# EAGLE board SchematicTSC (EAGLE 9.7.0)
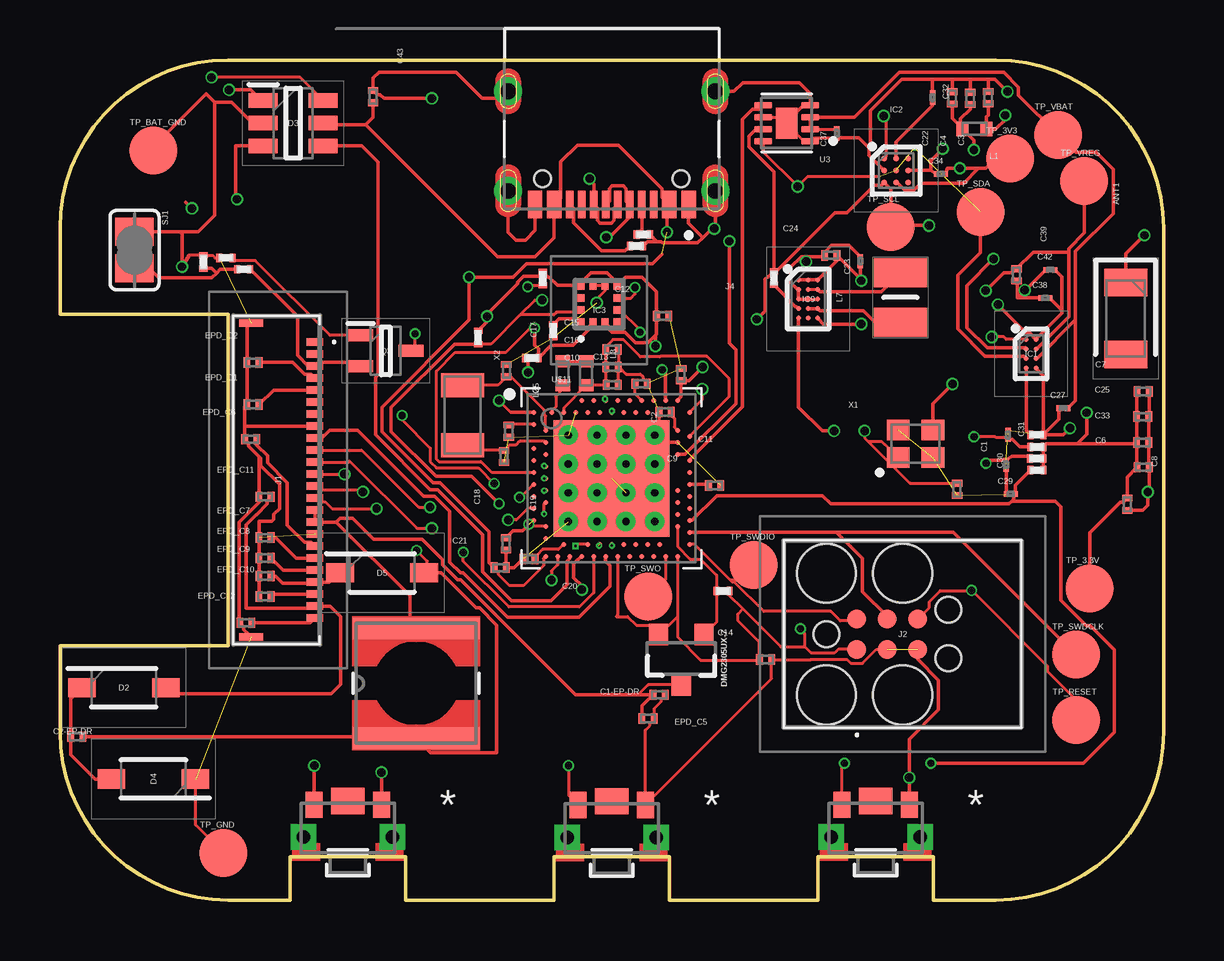
[diagram p0: board, top side]
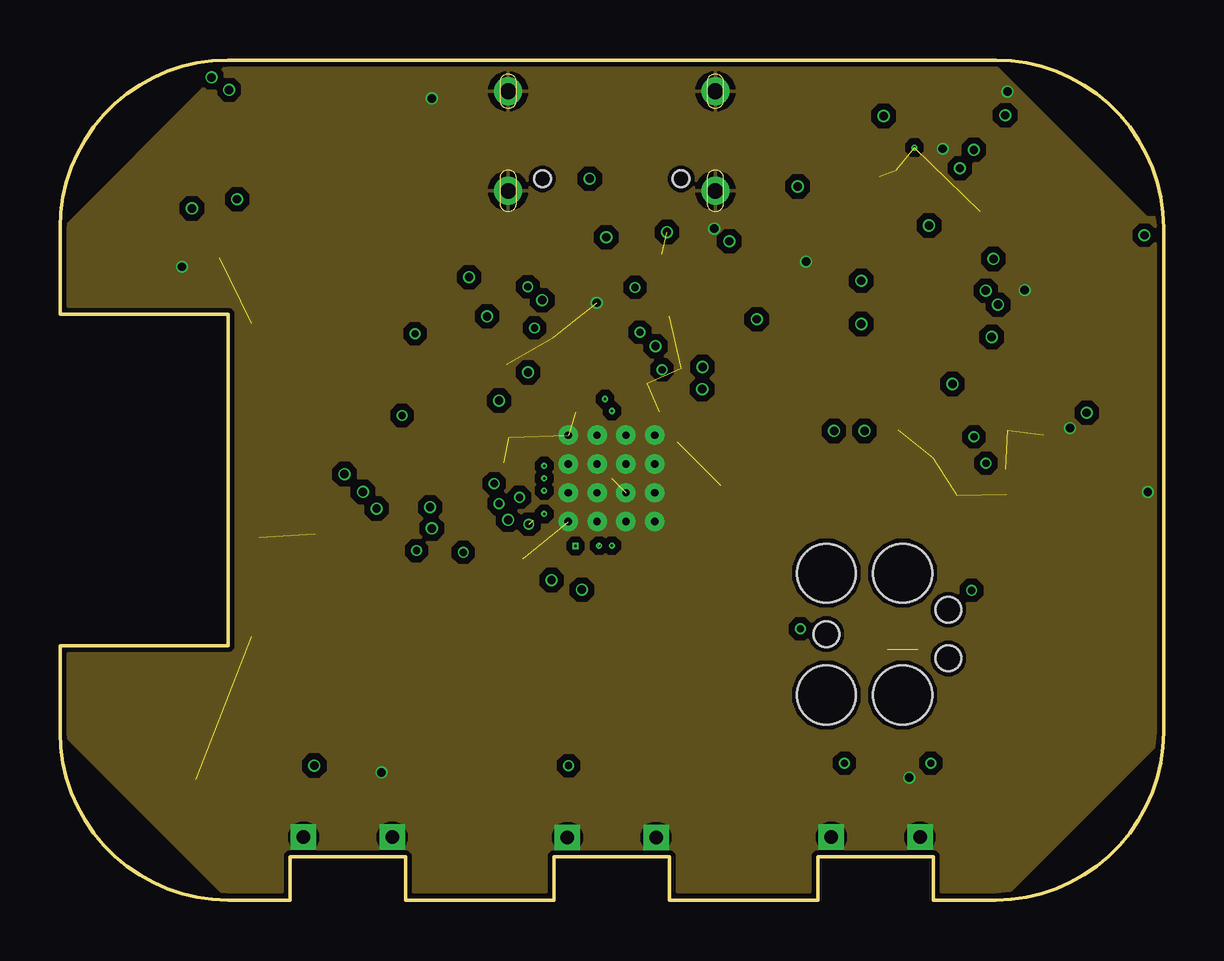
[diagram p1: board, inner layer Route2]
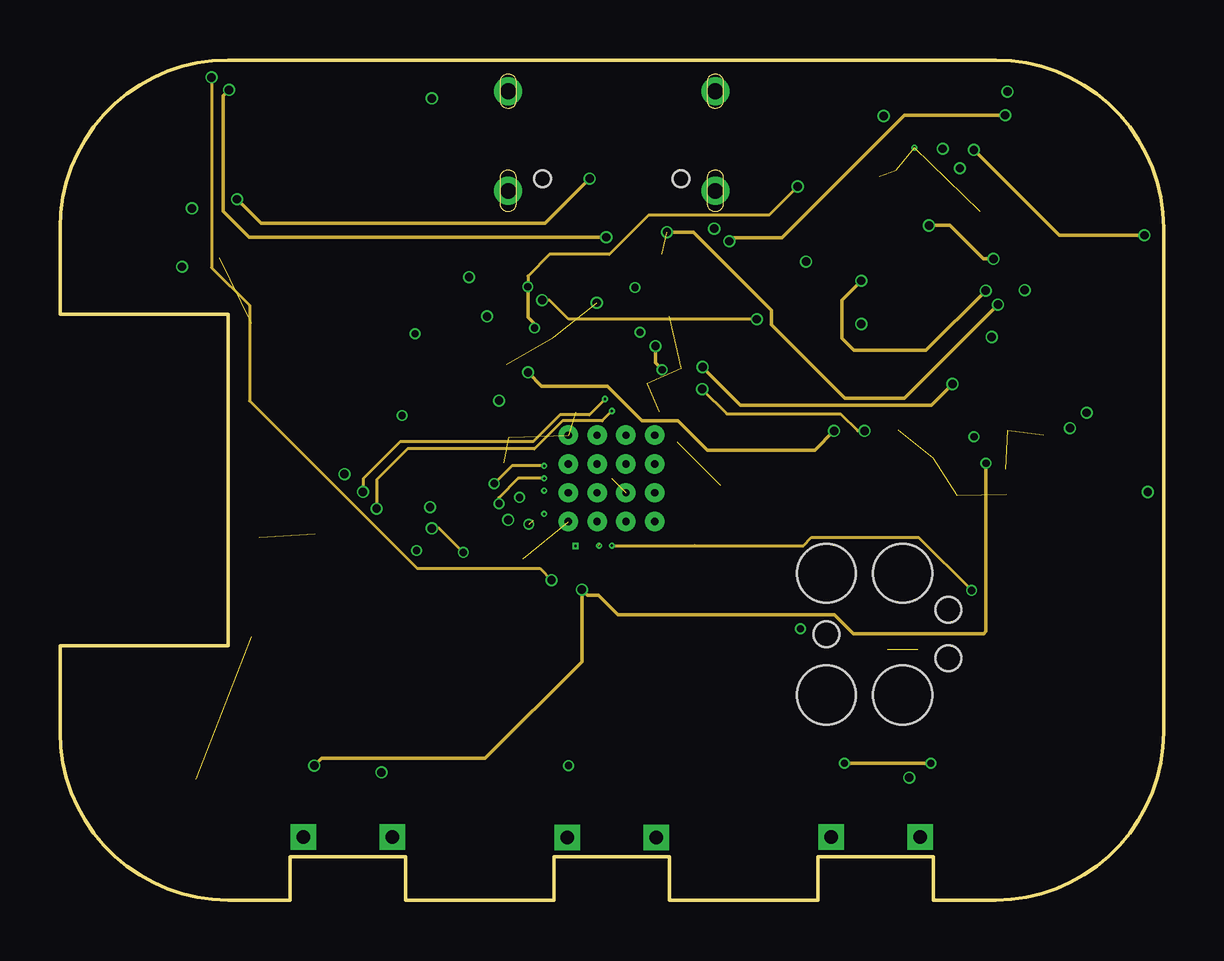
[diagram p2: board, inner layer Route63]
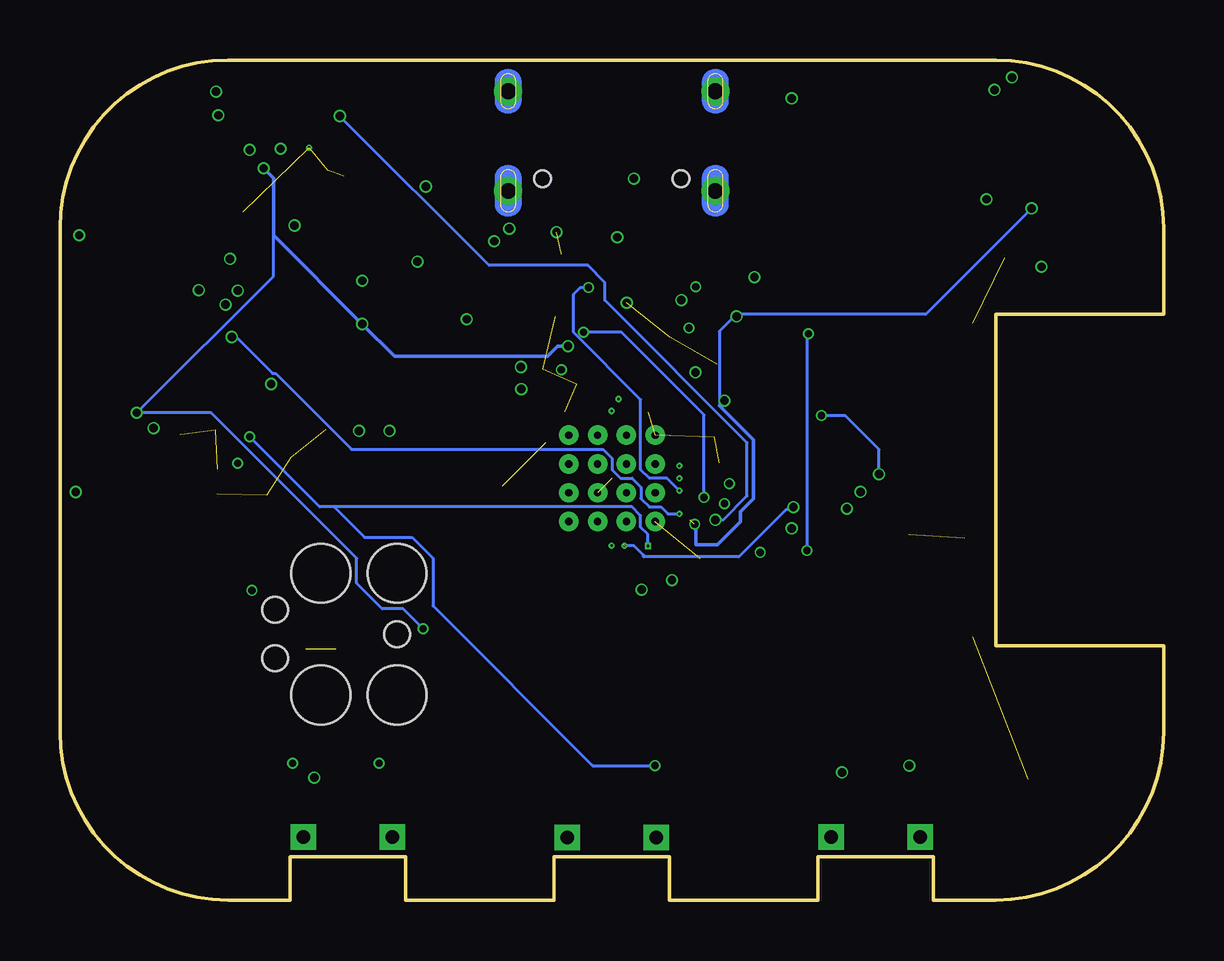
[diagram p3: board, bottom side, seen from below]

Size 46 x 35 mm. Coordinates in mm from the lower left corner, seen from the top.
Outline: 39,0 36.4,0 36.4,1.8 31.6,1.8 31.6,0 25.4,0 25.4,1.8 20.6,1.8 20.6,0 14.4,0 14.4,1.8 9.6,1.8 9.6,0 7,0 arc-90 0,7 0,10.6 7,10.6 7,24.4 0,24.4 0,28 arc-90 7,35 39,35 arc-90 46,28 46,7 arc-90 39,0
Copper layers (1+2*15+16): Top / Route2 / Route63 / Bottom
Stack-up 4 Layer Stack: Top SilkScreen Epoxy Ink / Top SolderMask SR:Green 0.0254mm Dk 4.3 / Top Surface Finish Lead-Free 0.02mm / Top User Defined 0.0151mm / Dielectric-1 User Defined 0.15mm / Route2 User Defined 0.0145mm / Dielectric-3 User Defined 0.55mm / Route63 User Defined 0.0145mm / Dielectric-5 User Defined 0.15mm / Bottom User Defined 0.0151mm / Bottom Surface Finish Lead-Free 0.02mm / Bottom SolderMask SR:Green 0.0254mm Dk 4.3 / Bottom SilkScreen Epoxy Ink
Design rules: minimum copper width 5mil, minimum drill size 0.3mm, copper clearance wire_polygon to wire_polygon 5mil, copper clearance wire_polygon to pad_smd 5mil, copper clearance wire_polygon to via 5mil, copper clearance pad_smd to pad_smd 5mil, copper clearance pad_smd to via 0.027mm, copper clearance via to via 0.027mm, copper clearance smd to pad (same net) 5mil, copper clearance smd to via (same net) 5mil, copper clearance smd to smd (same net) 5mil, dimension clearance 0.2mm, via restrict clearance 0mil, restrict clearance 0mil, drill distance 6mil, keepout clearance 0mil

## Footprints (pad centres in the part's own frame; a part is rotated, then mirrored left to right if it is on the bottom)
2450AT18B100E_ANTC3216X140N = smd 1.15 x 1.8: 1 -1.5,0; 2 1.5,0
NORDIC_NRF_3_RESC0201_L = smd 0.28 x 0.43: 1 -0.255,0; 2 0.255,0
GRM011R60J152KE01L_2_CAPC0201X13N = smd 0.22 x 0.23: 1 -0.185,0; 2 0.185,0
ESP32_C6_LIBRARY_5_SOD3716X135N = smd 1.15 x 0.8: 1 -1.75,0; 2 1.75,0
ESP32_C6_LIBRARY_3_SOT95P280X145-6N = smd 1.2 x 0.6: 1 -1.25,0.95; 2 -1.25,0; 3 -1.25,-0.95; 4 1.25,-0.95; 5 1.25,0; 6 1.25,0.95
ESP32_C6_LIBRARY_4_ESP32_C6_LIBRARY_4_ESP32_C6_LIBRARY_4_ESP32_C6_LIBRARY_4_ESP32_WROVER_SPARKFUN-DISCRETESEMI_SOT23-3 = smd 0.8 x 0.9: 1 -0.95,-1; 2 0.95,-1; 3 0,1.1
BQ25180YBGR_BGA8C40P2X4_100X155X50 = smd 0.2 x 0.2: A1 -0.2,0.6; A2 0.2,0.6; B1 -0.2,0.2; B2 0.2,0.2; C1 -0.2,-0.2; C2 0.2,-0.2; D1 -0.2,-0.6; D2 0.2,-0.6
DRV2605YZFR_BGA9C50P3X3_144X144X62 = smd 0.25 x 0.25: A1 -0.5,0.5; A2 0,0.5; A3 0.5,0.5; B1 -0.5,0; B2 0,0; B3 0.5,0; C1 -0.5,-0.5; C2 0,-0.5; C3 0.5,-0.5
BMA423_BMA423 = smd 0.3 x 0.35: 1 -0.75,-0.775; 2 -0.25,-0.775; 3 0.25,-0.775; 4 0.75,-0.775; 7 0.75,0.775; 8 0.25,0.775; 9 -0.25,0.775; 10 -0.75,0.775 | smd 0.35 x 0.3: 5 0.775,-0.25; 6 0.775,0.25; 11 -0.775,0.25; 12 -0.775,-0.25
RT6160AWSC_BGA15C40P3X5_140X230X60 = smd 0.216 x 0.216: A1 -0.4,0.8; A2 0,0.8; A3 0.4,0.8; B1 -0.4,0.4; B2 0,0.4; B3 0.4,0.4; C1 -0.4,0; C2 0,0; C3 0.4,0; D1 -0.4,-0.4; D2 0,-0.4; D3 0.4,-0.4; E1 -0.4,-0.8; E2 0,-0.8; E3 0.4,-0.8
503480-2400_5034802400 = smd 0.3 x 0.7: 1 -5.75,1.525; 2 -5.25,1.525; 3 -4.75,1.525; 4 -4.25,1.525; 5 -3.75,1.525; 6 -3.25,1.525; 7 -2.75,1.525; 8 -2.25,1.525; 9 -1.75,1.525; 10 -1.25,1.525; 11 -0.75,1.525; 12 -0.25,1.525; 13 0.25,1.525; 14 0.75,1.525; 15 1.25,1.525; 16 1.75,1.525; 17 2.25,1.525; 18 2.75,1.525; 19 3.25,1.525; 20 3.75,1.525; 21 4.25,1.525; 22 4.75,1.525; 23 5.25,1.525; 24 5.75,1.525 | smd 0.3 x 1: MP1 -6.54,-1.125; MP2 6.54,-1.125
TC2030-IDC_TC2030IDC = smd 0.783 x 0.783: 1 -0.953,-0.635; 2 -0.953,0.635; 3 0.317,-0.635; 4 0.317,0.635; 5 1.588,-0.635; 6 1.588,0.635 | hole 2.451: -2.223,-2.54; -2.223,2.54; 0.952,-2.54; 0.952,2.54 | hole 1.067: -2.223,0; 2.857,-1.016; 2.857,1.016
KH-TYPE-C-16P_KINGHELM_KH-TYPE-C-16P = smd 0.6 x 1.15: A1_B12 -3.2,4.725; A4_B9 -2.4,4.725; A9_B4 2.4,4.725; A12_B1 3.2,4.725 | smd 0.3 x 1.15: A5 -1.25,4.725; A6 -0.25,4.725; A7 0.25,4.725; A8 1.25,4.725; B5 1.75,4.725; B6 0.75,4.725; B7 -0.75,4.725; B8 -1.75,4.725 | drill 0.65 pad 1.05: SH1 -4.32,0; SH2 4.32,0; SH3 -4.32,4.15; SH4 4.32,4.15 | hole 0.7: -2.89,3.65; 2.89,3.65
NORDIC_NRF_2_RESC0402_L = smd 0.5 x 0.6: 1 -0.5,0; 2 0.5,0
ESP32_C6_LIBRARY_2_IND_4828-WE-TPC_WRE = smd 0.9 x 5.3: 1 -2.286,0; 2 2.286,0
MLP2016SR47MT0S1_INDC2016X100N = smd 1.2 x 2.2: 1 -1.028,0; 2 1.028,0
ESP32_C6_LIBRARY_6_SOT65P210X110-3N = smd 1.05 x 0.5: 1 -1.05,0.65; 2 -1.05,-0.65; 3 1.05,0
CPF0201D7K68C1_0201 = smd 0.35 x 0.25: 1 0,0.275; 2 0,-0.275
ESP32_C6_LIBRARY_7_JUMPER_SJ = smd 1.168 x 1.6: 1 -0.762,0; 2 0.762,0
2025-10-22_07-23-44_LIBRARY_SW_EVP-AKE31A_PAN = smd 0.711 x 1.092: 1 -1.4,-0.972; 2 1.4,-0.972 | drill 0.559 pad 0.914 square: 3 -1.848,0.381; 4 1.848,0.381 | smd 1.397 x 1.092: 5 0,-1.124
HECTOR_WATCH_1_TP20R = smd 2 x 2: TP 0,0
ESP32_C6_LIBRARY_SON50P200X200X80-9N = smd 0.76 x 0.27: 1 -0.985,0.75; 2 -0.985,0.25; 3 -0.985,-0.25; 4 -0.985,-0.75; 5 0.985,-0.75; 6 0.985,-0.25; 7 0.985,0.25; 8 0.985,0.75 | smd 0.9 x 1.3: 9 0,0
NORDIC_NRF_4_AQFN50P700X700X85_HS-74N = smd 4.85 x 4.85: P$74 0,0 | drill 0.3 pad 0.6: P$75 -1.8,1.8; P$76 -0.6,1.8; P$77 0.6,1.8; P$78 1.8,1.8; P$79 -1.8,0.6; P$80 -0.6,0.6; P$81 0.6,0.6; P$82 1.8,0.6; P$83 -1.8,-0.6; P$84 -0.6,-0.6; P$85 0.6,-0.6; P$86 1.8,-0.6; P$87 -1.8,-1.8; P$88 -0.6,-1.8; P$89 0.6,-1.8; P$90 1.8,-1.8 | smd 0.2 x 0.2: P$A8 -1.25,3.25; P$A10 -0.75,3.25; P$A12 -0.25,3.25; P$A14 0.25,3.25; P$A16 0.75,3.25; P$A18 1.25,3.25; P$A20 1.75,3.25; P$A22 2.25,3.25; P$A23 2.75,3.25; P$AA24 3.25,-2.25; P$AB2 -2.75,-2.5; P$AC5 -2,-2.75; P$AC9 -1,-2.75; P$AC11 -0.5,-2.75; P$AC13 0,-2.75; P$AC15 0.5,-2.75; P$AC17 1,-2.75; P$AC19 1.5,-2.75; P$AC21 2,-2.75; P$AC24 3.25,-2.75; P$AD2 -2.75,-3.25; P$AD4 -2.25,-3.25; P$AD6 -1.75,-3.25; P$AD8 -1.25,-3.25; P$AD10 -0.75,-3.25; P$AD12 -0.25,-3.25; P$AD14 0.25,-3.25; P$AD16 0.75,-3.25; P$AD18 1.25,-3.25; P$AD20 1.75,-3.25; P$AD22 2.25,-3.25; P$AD23 2.75,-3.25; P$B1 -3.25,2.75; P$B3 -2.5,2.75; P$B5 -2,2.75; P$B7 -1.5,2.75; P$B9 -1,2.75; P$B11 -0.5,2.75; P$B13 0,2.75; P$B15 0.5,2.75; P$B17 1,2.75; P$B19 1.5,2.75; P$B24 3.25,2.75; P$C1 -3.25,2.25; P$D2 -2.75,2; P$D23 2.75,2; P$E24 3.25,1.75; P$F2 -2.75,1.5; P$F23 2.75,1.5; P$G1 -3.25,1.25; P$H2 -2.75,1; P$H23 2.75,1; P$J1 -3.25,0.75; P$J24 3.25,0.75; P$K2 -2.75,0.5; P$L1 -3.25,0.25; P$L24 3.25,0.25; P$M2 -2.75,0; P$N1 -3.25,-0.25; P$N24 3.25,-0.25; P$P2 -2.75,-0.5; P$P23 2.75,-0.5; P$R1 -3.25,-0.75; P$R24 3.25,-0.75; P$T2 -2.75,-1; P$T23 2.75,-1; P$U1 -3.25,-1.25; P$U24 3.25,-1.25; P$V23 2.75,-1.5; P$W1 -3.25,-1.75; P$W24 3.25,-1.75; P$Y2 -2.75,-2; P$Y23 2.75,-2
NORDIC_NRF_BT-XTAL_2016_N = smd 0.95 x 0.85: 1 -0.725,-0.575; 2 0.725,-0.575; 3 0.725,0.575; 4 -0.725,0.575
NORDIC_NRF_1_XTAL_3215_N = smd 1 x 1.8: 1 -1.25,0; 2 1.25,0

## Placement (x,y rotation side)
ANT1  2450AT18B100E  [2450AT18B100E_ANTC3216X140N]  44.42,24.23 270 top
C1  12pF  [NORDIC_NRF_3_RESC0201_L]  37.39,17.11 270 top
C1-EP-DR  10uF  [NORDIC_NRF_3_RESC0201_L]  24.51,7.56 0 top
C2  12pF  [NORDIC_NRF_3_RESC0201_L]  25.89,21.89 90 top
C2-EP-DR  4.7uF/25V  [NORDIC_NRF_3_RESC0201_L]  0.71,6.8 0 top
C3  1pF  [NORDIC_NRF_3_RESC0201_L]  38.69,33.43 90 top
C4  1pF  [NORDIC_NRF_3_RESC0201_L]  37.94,33.4 90 top
C5  100nF  [NORDIC_NRF_3_RESC0201_L]  18.71,19.54 270 top
C6  4.7μF  [NORDIC_NRF_3_RESC0201_L]  45.15,18.03 0 top
C7  100nF  [NORDIC_NRF_3_RESC0201_L]  45.15,21.19 0 top
C8  100nF  [NORDIC_NRF_3_RESC0201_L]  44.49,16.49 270 top
C9  820pF  [NORDIC_NRF_3_RESC0201_L]  27.29,17.27 0 top
C10  N. C.  [NORDIC_NRF_3_RESC0201_L]  23.02,21.47 0 top
C11  100pF  [NORDIC_NRF_3_RESC0201_L]  25.22,20.34 180 top
C12  100nF  [NORDIC_NRF_3_RESC0201_L]  25.12,24.33 0 top
C13  N. C.  [NORDIC_NRF_3_RESC0201_L]  24.22,21.51 0 top
C14  4.7μF  [NORDIC_NRF_3_RESC0201_L]  29.41,10.02 0 top
C15  1.0μF  [NORDIC_NRF_3_RESC0201_L]  23.01,22.94 0 top
C16  47nF  [NORDIC_NRF_3_RESC0201_L]  23.01,22.21 0 top
C17  12pF  [NORDIC_NRF_3_RESC0201_L]  18.61,22.06 270 top
C18  12pF  [NORDIC_NRF_3_RESC0201_L]  18.51,18.48 90 top
C19  100nF  [NORDIC_NRF_3_RESC0201_L]  18.59,14.84 270 top
C20  4.7μF  [NORDIC_NRF_3_RESC0201_L]  19.55,14.21 180 top
C21  4.7μF  [NORDIC_NRF_3_RESC0201_L]  18.35,13.85 0 top
C22  N. C.  [NORDIC_NRF_3_RESC0201_L]  37.19,33.42 90 top
C23  0.1uF  [GRM011R60J152KE01L_2_CAPC0201X13N]  33.36,26.62 90 top
C24  10uF  [NORDIC_NRF_3_RESC0201_L]  32.13,26.86 0 top
C25  22uF  [NORDIC_NRF_3_RESC0201_L]  45.13,20.14 0 top
C27  0.1uF  [GRM011R60J152KE01L_2_CAPC0201X13N]  41.82,20.49 0 top
C29  1uF  [GRM011R60J152KE01L_2_CAPC0201X13N]  39.63,16.91 0 top
C30  1uF  [GRM011R60J152KE01L_2_CAPC0201X13N]  39.43,18.14 90 top
C31  1uF  [GRM011R60J152KE01L_2_CAPC0201X13N]  39.52,19.38 270 top
C32  1uF  [GRM011R60J152KE01L_2_CAPC0201X13N]  36.37,33.44 270 top
C33  22uF  [NORDIC_NRF_3_RESC0201_L]  45.13,19.06 0 top
C34  0.1uF  [GRM011R60J152KE01L_2_CAPC0201X13N]  36.72,30.25 0 top
C37  1uF  [GRM011R60J152KE01L_2_CAPC0201X13N]  32.37,31.94 90 top
C38  1uF  [GRM011R60J152KE01L_2_CAPC0201X13N]  41.07,25.08 0 top
C39  10uF  [NORDIC_NRF_3_RESC0201_L]  39.87,26.05 270 top
C42  0.1uF  [GRM011R60J152KE01L_2_CAPC0201X13N]  41.28,26.26 0 top
C43  4.7uF  [NORDIC_NRF_3_RESC0201_L]  13.05,33.47 270 top
D2  MBR0530  [ESP32_C6_LIBRARY_5_SOD3716X135N]  2.66,8.85 0 top
D3  USBLC6-2SC6Y  [ESP32_C6_LIBRARY_3_SOT95P280X145-6N]  9.72,32.37 0 top
D4  MBR0530  [ESP32_C6_LIBRARY_5_SOD3716X135N]  3.9,5.04 180 top
D5  MBR0530  [ESP32_C6_LIBRARY_5_SOD3716X135N]  13.43,13.63 0 top
DMG2305UX-7  20V/4.2A/52mΩ/1.4W  [ESP32_C6_LIBRARY_4_ESP32_C6_LIBRARY_4_ESP32_C6_LIBRARY_4_ESP32_C6_LIBRARY_4_ESP32_WROVER_SPARKFUN-DISCRETESEMI_SOT23-3]  25.9,10.06 180 top
EPD_C1  1uF/50V  [NORDIC_NRF_3_RESC0201_L]  8.05,20.65 0 top
EPD_C2  1uF/50V  [NORDIC_NRF_3_RESC0201_L]  8.05,22.4 0 top
EPD_C5  1uF/50V  [NORDIC_NRF_3_RESC0201_L]  24.98,8.55 180 top
EPD_C6  1uF/50V  [NORDIC_NRF_3_RESC0201_L]  7.95,19.2 0 top
EPD_C7  1uF/50V  [NORDIC_NRF_3_RESC0201_L]  8.55,15.1 0 top
EPD_C8  1uF/50V  [NORDIC_NRF_3_RESC0201_L]  8.55,14.25 0 top
EPD_C9  1uF/50V  [NORDIC_NRF_3_RESC0201_L]  8.55,13.5 0 top
EPD_C10  1uF/50V  [NORDIC_NRF_3_RESC0201_L]  8.55,12.65 0 top
EPD_C11  1uF/50V  [NORDIC_NRF_3_RESC0201_L]  8.55,16.8 0 top
EPD_C12  1uF/50V  [NORDIC_NRF_3_RESC0201_L]  7.75,11.55 0 top
IC1  BQ25180YBGR  [BQ25180YBGR_BGA8C40P2X4_100X155X50]  40.48,22.76 0 top
IC2  DRV2605YZFR  [DRV2605YZFR_BGA9C50P3X3_144X144X62]  34.85,30.4 0 top
IC3  BMA423_BMA423  [BMA423_BMA423]  22.47,24.83 0 top
IC9  RT6160AWSC  [RT6160AWSC_BGA15C40P3X5_140X230X60]  31.19,25.04 0 top
J1  503480-2400  [503480-2400_5034802400]  9.1,17.5 270 top
J2  IDC_TC2030-IDC  [TC2030-IDC_TC2030IDC]  34.17,11.08 0 top
J4  KH-TYPE-C-16P  [KH-TYPE-C-16P_KINGHELM_KH-TYPE-C-16P]  23,33.7 180 top
L1  3.9nH  [NORDIC_NRF_2_RESC0402_L]  38.12,32.13 180 top
L2  10μH  [NORDIC_NRF_2_RESC0402_L]  20.95,21.94 90 top
L3  15nH  [NORDIC_NRF_2_RESC0402_L]  21.93,21.94 270 top
L5  68uH  [ESP32_C6_LIBRARY_2_IND_4828-WE-TPC_WRE]  14.85,9.03 90 top
L7  FTC252012SR47MBCA  [MLP2016SR47MT0S1_INDC2016X100N]  35.03,25.11 270 top
Q3  SI1308EDL-T1-GE3  [ESP32_C6_LIBRARY_6_SOT65P210X110-3N]  13.58,22.88 0 top
R1_EP_DR  0.47  [CPF0201D7K68C1_0201]  7.66,26.28 90 top
R1_USB  5K1  [CPF0201D7K68C1_0201]  24.31,27.73 270.4 top
R2  0  [CPF0201D7K68C1_0201]  19.67,22.58 270 top
R2_EP_DR  10K  [CPF0201D7K68C1_0201]  6.92,26.76 90 top
R2_USB  5K1  [CPF0201D7K68C1_0201]  24.03,27.25 90 top
R3  0  [CPF0201D7K68C1_0201]  20.57,23.72 0 top
R4  0  [CPF0201D7K68C1_0201]  29.76,25.92 0 top
R5  10K  [CPF0201D7K68C1_0201]  40.71,18.4 90 top
R7  10K  [CPF0201D7K68C1_0201]  40.72,17.91 90 top
R8  10K  [CPF0201D7K68C1_0201]  40.72,18.88 90 top
R9  10K  [CPF0201D7K68C1_0201]  40.72,19.38 270 top
R17  3K3  [CPF0201D7K68C1_0201]  17.43,23.44 0 top
R18  3K3  [CPF0201D7K68C1_0201]  20.13,25.9 0 top
R_PWR_EPD  10K  [CPF0201D7K68C1_0201]  27.64,12.88 90 top
R_TYPE_SEL  2.2  [CPF0201D7K68C1_0201]  5.98,26.58 0 top
SJ1  [ESP32_C6_LIBRARY_7_JUMPER_SJ]  3.11,27.08 270 top
SW_DN  2025-10-22_07-23-44_LIBRARY_EVP-AKE31ASW_EVP-AKE31A_PAN  [2025-10-22_07-23-44_LIBRARY_SW_EVP-AKE31A_PAN]  34,3 180 top
SW_ENT  2025-10-22_07-23-44_LIBRARY_EVP-AKE31ASW_EVP-AKE31A_PAN  [2025-10-22_07-23-44_LIBRARY_SW_EVP-AKE31A_PAN]  23,2.99 180 top
SW_UP  2025-10-22_07-23-44_LIBRARY_EVP-AKE31ASW_EVP-AKE31A_PAN  [2025-10-22_07-23-44_LIBRARY_SW_EVP-AKE31A_PAN]  12,3 180 top
TP_3.3V  HECTOR_WATCH_1_TPTP20R  [HECTOR_WATCH_1_TP20R]  42.92,12.98 0 top
TP_3V3  HECTOR_WATCH_1_TPTP20R  [HECTOR_WATCH_1_TP20R]  39.6,30.89 0 top
TP_BAT_GND  HECTOR_WATCH_1_TPTP20R  [HECTOR_WATCH_1_TP20R]  3.89,31.23 0 top
TP_GND  HECTOR_WATCH_1_TPTP20R  [HECTOR_WATCH_1_TP20R]  6.82,1.96 0 top
TP_RESET  HECTOR_WATCH_1_TPTP20R  [HECTOR_WATCH_1_TP20R]  42.36,7.5 0 top
TP_SCL  HECTOR_WATCH_1_TPTP20R  [HECTOR_WATCH_1_TP20R]  34.63,28.03 0 top
TP_SDA  HECTOR_WATCH_1_TPTP20R  [HECTOR_WATCH_1_TP20R]  38.37,28.68 0 top
TP_SWDCLK  HECTOR_WATCH_1_TPTP20R  [HECTOR_WATCH_1_TP20R]  42.35,10.22 0 top
TP_SWDIO  HECTOR_WATCH_1_TPTP20R  [HECTOR_WATCH_1_TP20R]  28.92,13.96 0 top
TP_SWO  HECTOR_WATCH_1_TPTP20R  [HECTOR_WATCH_1_TP20R]  24.52,12.64 0 top
TP_VBAT  HECTOR_WATCH_1_TPTP20R  [HECTOR_WATCH_1_TP20R]  41.61,31.88 0 top
TP_VREG  HECTOR_WATCH_1_TPTP20R  [HECTOR_WATCH_1_TP20R]  42.7,29.95 0 top
U3  MAX17048G+T10  [ESP32_C6_LIBRARY_SON50P200X200X80-9N]  30.29,32.37 180 top
U$11  NRF52840_QF  [NORDIC_NRF_4_AQFN50P700X700X85_HS-74N]  22.99,17.57 0 top
X1  32MHz  [NORDIC_NRF_BT-XTAL_2016_N]  35.66,19.01 0 top
X2  32.769kHz  [NORDIC_NRF_1_XTAL_3215_N]  16.78,20.2 270 top

## Library data of the parts
ANT1 = InkTime_v5; ARROW_PART_NUMBER: 2450AT18B100E; ARROW_PRICE-STOCK: https://www.arrow.com/en/products/2450at18b100e/johanson-dielectrics?utm_currency=USD&region=nac; DESCRIPTION: Antennas 2.45GHz ANTENNA; HEIGHT: 1.4mm; MANUFACTURER_NAME: JOHANSON TECHNOLOGY; MANUFACTURER_PART_NUMBER: 2450AT18B100E; MOUSER_PART_NUMBER: 609-2450AT18B100E; MOUSER_PRICE-STOCK: https://www.mouser.co.uk/ProductDetail/Johanson-Technology/2450AT18B100E?qs=yCnrNFeXz%252Bh5MFsFIXGZGA%3D%3D
C1 C1-EP-DR C2 C2-EP-DR C3-C22 C24 C25 C33 C39 C43 EPD_C1 EPD_C2 EPD_C5-EPD_C12 L1-L3 R1_EP_DR R1_USB R2 R2_EP_DR R2_USB R3-R5 R7-R9 R17 R18 R_PWR_EPD R_TYPE_SEL SJ1 TP_3.3V TP_3V3 TP_BAT_GND TP_GND TP_RESET TP_SCL TP_SDA TP_SWDCLK TP_SWDIO TP_SWO TP_VBAT TP_VREG U$11 X1 X2 = InkTime_v5
C23 C27 C29-C32 C34 C37 C38 C42 = InkTime_v5; AVAILABILITY: In Stock; CHECK_PRICES: https://www.snapeda.com/parts/GRM011R60J152KE01L/Murata/view-part/?ref=eda; DESCRIPTION: SMD Capacitor X5R(EIA) with Capacitance: 1500pF Tol. 10%. Rated Voltage: 6.3Vdc; MF: Murata; MP: GRM011R60J152KE01L; PACKAGE: 0201 Murata; PRICE: None; SNAPEDA_LINK: https://www.snapeda.com/parts/GRM011R60J152KE01L/Murata/view-part/?ref=snap
D2 D4 D5 = InkTime_v5; AVAILABILITY: In Stock; CHECK_PRICES: https://www.snapeda.com/parts/MBR0530/Onsemi/view-part/?ref=eda; DESCRIPTION: Diode Schottky 30 V 500mA Surface Mount SOD-123; MF: ON Semiconductor; MP: MBR0530; PACKAGE: SOD-123-2 ON Semiconductor; PRICE: None; PURCHASE-URL: https://www.snapeda.com/api/url_track_click_mouser/?unipart_id=179458&manufacturer=ON Semiconductor&part_name=MBR0530&search_term=None; SNAPEDA_LINK: https://www.snapeda.com/parts/MBR0530/Onsemi/view-part/?ref=snap
D3 = InkTime_v5; AVAILABILITY: In Stock; CHECK_PRICES: https://www.snapeda.com/parts/USBLC6-2SC6Y/STMicroelectronics/view-part/?ref=eda; DESCRIPTION: 17V Clamp 5A (8/20µs) Ipp Tvs Diode Surface Mount SOT-23-6; MF: STMicroelectronics; MP: USBLC6-2SC6Y; PACKAGE: SOT-23-6 STMicroelectronics; PRICE: None; SNAPEDA_LINK: https://www.snapeda.com/parts/USBLC6-2SC6Y/STMicroelectronics/view-part/?ref=snap
DMG2305UX-7 = InkTime_v5; PROD_ID: TRAN-14388
IC1 = InkTime_v5; ARROW_PART_NUMBER: BQ25180YBGR; ARROW_PRICE-STOCK: https://www.arrow.com/en/products/bq25180ybgr/texas-instruments?utm_currency=USD&region=nac; DESCRIPTION: Charger IC Lithium Ion/Polymer, Lithium Iron Phosphate 8-DSBGA (1.6x1.1); HEIGHT: 0.5mm; MANUFACTURER_NAME: Texas Instruments; MANUFACTURER_PART_NUMBER: BQ25180YBGR; MOUSER_PART_NUMBER: 595-BQ25180YBGR; MOUSER_PRICE-STOCK: https://www.mouser.co.uk/ProductDetail/Texas-Instruments/BQ25180YBGR?qs=doiCPypUmgEWjAK%252BJAX6Tw%3D%3D
IC2 = InkTime_v5; ARROW_PART_NUMBER: DRV2605YZFR; ARROW_PRICE-STOCK: https://www.arrow.com/en/products/drv2605yzfr/texas-instruments?region=nac; DESCRIPTION: Haptic Driver for ERM/LRA with Built-In Library and Smart Loop Architecture; HEIGHT: 0.625mm; MANUFACTURER_NAME: Texas Instruments; MANUFACTURER_PART_NUMBER: DRV2605YZFR
IC3 = InkTime_v5; ARROW_PART_NUMBER: BMA423; ARROW_PRICE-STOCK: https://www.arrow.com/en/products/bma423/bosch; DESCRIPTION: Accelerometers Triaxial low-g 12bit Acceleration Sensor; HEIGHT: 1mm; MANUFACTURER_NAME: BOSCH; MANUFACTURER_PART_NUMBER: BMA423; MOUSER_PART_NUMBER: 262-BMA423; MOUSER_PRICE-STOCK: https://www.mouser.co.uk/ProductDetail/Bosch-Sensortec/BMA423?qs=HXFqYaX1Q2xC%252BSgeGoX3mg%3D%3D
IC9 = InkTime_v5; DESCRIPTION: Buck-Boost Regulator Positive Output Step-Up/Step-Down I2C DC-DC Controller IC 15-WL-CSP (BSC) (1.4x2.3); HEIGHT: 0.6mm; MANUFACTURER_NAME: RICHTEK; MANUFACTURER_PART_NUMBER: RT6160AWSC; MOUSER_PART_NUMBER: 835-RT6160AWSC; MOUSER_PRICE-STOCK: https://www.mouser.co.uk/ProductDetail/Richtek/RT6160AWSC?qs=amGC7iS6iy%2FLd9PSoixZXQ%3D%3D
J1 = InkTime_v5; DESCRIPTION: FFC & FPC Connectors 0.5mm FPC RA SMT Dual Contact 24Ckt; HEIGHT: 1.87mm; MANUFACTURER_NAME: Molex; MANUFACTURER_PART_NUMBER: 503480-2400; MOUSER_PART_NUMBER: 538-503480-2400; MOUSER_PRICE-STOCK: https://www.mouser.co.uk/ProductDetail/Molex/503480-2400?qs=OAhjpuo3Vu7efIoxFh9AOw%3D%3D
J2 = InkTime_v5; DESCRIPTION: CABLE ADAPTER 6 POS; HEIGHT: 19mm; MANUFACTURER_NAME: Tag Connect; MANUFACTURER_PART_NUMBER: TC2030-IDC
J4 = InkTime_v5; AVAILABILITY: Not in stock; CHECK_PRICES: https://www.snapeda.com/parts/KH-TYPE-C-16P/Kinghelm/view-part/?ref=eda; MF: kinghelm; MP: KH-TYPE-C-16P; PACKAGE: None; PRICE: None; SNAPEDA_LINK: https://www.snapeda.com/parts/KH-TYPE-C-16P/Kinghelm/view-part/?ref=snap
L5 = InkTime_v5; COPYRIGHT: Copyright (C) 2024 Ultra Librarian. All rights reserved.; MANUFACTURER_PART_NUMBER: 744043680; MFR_NAME: Wurth Electronics
L7 = InkTime_v5; DESCRIPTION: SMD / SMT Inductors (Coils), L=0.47?H, L x W x T :; HEIGHT: 1mm; JLCPCB: https://jlcpcb.com/partdetail/6763488-FTC252012SR47MBCA/C5832368; MANUFACTURER_NAME: TDK; MANUFACTURER_PART_NUMBER: FTC252012SR47MBCA
Q3 = InkTime_v5; AVAILABILITY: In Stock; CHECK_PRICES: https://www.snapeda.com/parts/SI1308EDL-T1-GE3/Vishay+Siliconix/view-part/?ref=eda; DESCRIPTION: Si1308EDL-T1-GE3 N-channel MOSFET Transistor, 1.5 A, 30 V, 3-Pin SC-70 | Siliconix / Vishay SI1308EDL-T1-GE3; MF: Vishay Siliconix; MP: SI1308EDL-T1-GE3; PACKAGE: SOT-323 Vishay Semiconductor; PRICE: None; PURCHASE-URL: https://www.snapeda.com/api/url_track_click_mouser/?unipart_id=274603&manufacturer=Vishay Siliconix&part_name=SI1308EDL-T1-GE3&search_term=None; SNAPEDA_LINK: https://www.snapeda.com/parts/SI1308EDL-T1-GE3/Vishay+Siliconix/view-part/?ref=snap
SW_DN SW_ENT SW_UP = InkTime_v5; COPYRIGHT: Copyright (C) 2025 Ultra Librarian. All rights reserved.; DIGI-KEY_PART_NUMBER_1: P123437TR-ND; DIGI-KEY_PART_NUMBER_2: P123437CT-ND; DIGI-KEY_PART_NUMBER_3: P123437DKR-ND; MANUFACTURER_NAME: Panasonic; MANUFACTURER_PART_NUMBER: EVP-AKE31A
U3 = InkTime_v5; AVAILABILITY: In Stock; CHECK_PRICES: https://www.snapeda.com/parts/MAX17048G+T10/Analog+Devices/view-part/?ref=eda; DESCRIPTION: 3µA 1-Cell/2-Cell Fuel Gauge with ModelGauge; MF: Analog Devices; MP: MAX17048G+T10; PACKAGE: TDFN-8 Maxim; PRICE: None; PURCHASE-URL: https://www.snapeda.com/api/url_track_click_mouser/?unipart_id=329239&manufacturer=Analog Devices&part_name=MAX17048G+T10&search_term=None; SNAPEDA_LINK: https://www.snapeda.com/parts/MAX17048G+T10/Analog+Devices/view-part/?ref=snap

## Nets
3V3: C6.1 C7.1 C8.1 C12.1 C14.1 C19.1 C25.1 C33.1 C34.2 DMG2305UX-7.2 IC2.C2 IC3.3 IC3.7 IC3.10 IC9.E3 J2.1 R5.2 R7.2 R8.2 R17.1 R18.1 R_PWR_EPD.2 TP_3.3V.TP TP_3V3.TP U$11.P$A22 U$11.P$AD14 U$11.P$AD23 U$11.P$B1 U$11.P$W1 U$11.P$Y2
ALERT: U3.5 U$11.P$J24
D+: D3.4 U$11.P$AD6
D-: D3.6 U$11.P$AD4
DEC4_^: C10.1 C15.1 C16.1 L3.2 U$11.P$B5 U$11.P$E24
DN: D3.1 J4.A7 J4.B7
DP: D3.3 J4.A6 J4.B6
EPD_3V3: C1-EP-DR.1 DMG2305UX-7.3 EPD_C5.2 J1.15 J1.16 L5.2
EPD_BUSY: J1.9 U$11.P$AD12
EPD_CS: J1.12 U$11.P$K2
EPD_DC: J1.11 U$11.P$AD10
EPD_RST: J1.10 U$11.P$AC11
GDR: J1.2
GND: C1-EP-DR.2 C1.2 C2.2 C3.2 C4.2 C5.2 C6.2 C7.2 C8.2 C9.2 C10.2 C11.2 C12.2 C13.2 C14.2 C15.2 C16.2 C17.1 C18.1 C19.2 C20.2 C21.2 C22.2 C23.2 C24.1 C25.2 C27.1 C29.1 C30.1 C31.1 C32.1 C33.2 C34.1 C37.1 C38.1 C39.2 C42.1 C43.1 D3.2 D4.1 EPD_C1.1 EPD_C2.1 EPD_C5.1 EPD_C6.1 EPD_C7.1 EPD_C8.1 EPD_C9.1 EPD_C10.1 EPD_C11.1 EPD_C12.1 IC1.D2 IC2.B1 IC2.B3 IC3.8 IC3.9 IC9.B1 IC9.C1 IC9.C2 IC9.C3 J1.8 J1.17 J1.MP1 J1.MP2 J2.3 J2.5 J4.A1_B12 J4.A12_B1 J4.SH1 J4.SH2 J4.SH3 J4.SH4 R1_USB.1 R2_EP_DR.1 R2_USB.2 R3.2 R9.1 R_TYPE_SEL.1 SJ1.1 SW_DN.1 SW_ENT.1 SW_UP.1 TP_BAT_GND.TP TP_GND.TP U3.1 U3.4 U3.6 U3.9 U$11.P$74 U$11.P$75 U$11.P$76 U$11.P$77 U$11.P$78 U$11.P$79 U$11.P$80 U$11.P$81 U$11.P$82 U$11.P$83 U$11.P$84 U$11.P$85 U$11.P$86 U$11.P$87 U$11.P$88 U$11.P$89 U$11.P$90 U$11.P$B7 U$11.P$F23 X1.2 X1.4
HAPTIC_EN: IC2.A1 U$11.P$U1
IMU_INT1: IC3.5 U$11.P$N1
IMU_INT2: IC3.6 U$11.P$P2
LX1: IC9.B2 IC9.B3 L7.1
LX2: IC9.D2 IC9.D3 L7.2
MOSI: J1.14 U$11.P$B13
N$1: L2.2 L3.1
N$2: C2-EP-DR.1 D2.1 D4.2
N$3: C2-EP-DR.2 D5.2 L5.1 Q3.3
N$7: IC1.D1 R9.2
N$8: C17.2 U$11.P$D2 X2.1
N$9: C18.2 U$11.P$F2 X2.2
N$12: C5.1 U$11.P$C1
N$14: L2.1 U$11.P$B3
N$15: C2.1 U$11.P$A23 X1.3
N$25: C13.1 U$11.P$A18
N$26: C11.1 U$11.P$D23
N$27: C32.2 IC2.A2
N$28: C1.1 U$11.P$B24 X1.1
N$29: Q3.1 R2_EP_DR.2
N$30: C3.1 L1.1 U$11.P$H23
N$31: C9.1 U$11.P$N24
N$32: EPD_C12.2 J1.24
N$34: R1_EP_DR.1 R_TYPE_SEL.2 SJ1.2
N$35: EPD_C10.2 J1.22
N$37: EPD_C8.2 J1.20
N$38: EPD_C7.2 J1.19
N$39: EPD_C6.2 J1.18
N$46: ANT1.1 C4.1 C22.1 L1.2
N$50: C20.1 U$11.P$AC5
N$53: EPD_C1.2 J1.5
N$54: EPD_C2.2 J1.4
N$60: J4.A5 R1_USB.2
N$63: J4.B5 R2_USB.1
N$73: IC9.D1 R4.2
N$75: IC9.E1 R2.2
N$85: IC3.1 R3.1
OUT+: IC2.A3
OUT-: IC2.C3
P0.04: U$11.P$J1
P0.09: U$11.P$L24
P0.13: C30.2 R5.1 SW_UP.2 U$11.P$AD8
P0.14: C31.2 R8.1 SW_ENT.2 U$11.P$AC9
P0.19: U$11.P$AC15
P0.20: U$11.P$AD16
P0.21: U$11.P$AC17
P0.22: U$11.P$AD18
P0.23: U$11.P$AC19
P0.24: U$11.P$AD20
P0.25: U$11.P$AC21
P0.26: U$11.P$G1
P0.27: U$11.P$H2
P0.28: U$11.P$B11
P0.29: U$11.P$A10
P0.30: U$11.P$B9
P0.31: U$11.P$A8
P1.01: DMG2305UX-7.1 R_PWR_EPD.1 U$11.P$Y23
P1.02: C29.2 R7.1 SW_DN.2 U$11.P$W24
P1.03: U$11.P$V23
P1.04: U$11.P$U24
P1.05: U$11.P$T23
P1.06: U$11.P$R24
P1.07: U$11.P$P23
P1.09: U$11.P$R1
P1.10: U$11.P$A20
P1.11: U$11.P$B19
P1.12: U$11.P$B17
P1.13: U$11.P$A16
P1.14: U$11.P$B15
P1.15: U$11.P$A14
PMIC_INT: IC1.A1 U$11.P$T2
PREVGH: D5.1 EPD_C9.2 J1.21
PREVGL: D2.2 EPD_C11.2 J1.23
RESE: J1.3 Q3.2 R1_EP_DR.2
RESET: J2.6 TP_RESET.TP U$11.P$AC13
SCK: J1.13 U$11.P$A12
SCL: IC1.B1 IC2.C1 IC3.12 R4.1 R17.2 TP_SCL.TP U3.7 U$11.P$M2
SDA: IC1.C1 IC2.B2 IC3.2 R2.1 R18.2 TP_SDA.TP U3.8 U$11.P$L1
SWDCLK: J2.4 TP_SWDCLK.TP U$11.P$AA24
SWDIO: J2.2 TP_SWDIO.TP U$11.P$AC24
SWO: TP_SWO.TP U$11.P$AD22
VBAT: C27.2 C37.2 IC1.C2 TP_VBAT.TP U3.2 U3.3
VBUS: C21.1 C38.2 C42.2 C43.2 D3.5 IC1.A2 J4.A4_B9 J4.A9_B4 U$11.P$AD2
VREG: C23.1 C24.2 C39.1 IC1.B2 IC9.A1 IC9.A2 IC9.A3 TP_VREG.TP

## Tracks (layer width: path | path; a pad name or v marks a point on that pad's centre or on a via)
3V3  (via drill 0.3 pad 0.04, 0.35)  (1 unrouted)
  Top 0.127: J2.1 32.44,10.45 32.28,10.28 31.32,10.28 31.05,10.55 | 18.9,20.32 18.79,20.32 v18.3,20.81 | U$11.P$AD14 23.24,11.86 23.19,11.81 23.67,11.81 24.03,11.45 24.56,11.45 DMG2305UX-7.2 25,11.06 25.74,11.8 | U$11.P$Y2 19.63,15.57 v19.54,15.66 | 31.05,10.55 31.05,11.11 v30.86,11.3 | 28.47,12.12 30.05,10.55 31.05,10.55 | U$11.P$AD23 25.74,11.8 | 25.74,11.8 25.74,10.96 26.7,10 29.13,10 C14.1 29.16,10.75 28.26,11.64 28.26,11.91 28.47,12.12 | 28.47,12.12 27.91,12.68 R_PWR_EPD.2
  Top 0.152: IC2.C2 34.89,29.9 35.21,29.57 35.59,29.57 35.89,29.87 37.67,29.87 38.29,30.49 | R7.2 R5.2 41,18.41 R8.2 41.12,19 42.4,19 42.41,19.01 | TP_3V3.TP 38.99,30.89 38.59,30.49 38.29,30.49 | v33.4,24 31.83,24 IC9.E3 | 42.41,19.01 42.8,19.4 v42.8,20.3 | C33.1 C25.1 44.88,21.17 C7.1 | C33.1 44.88,18.05 C6.1 44.49,17.62 C8.1 44.32,16.58 44.19,16.58 42.92,15.31 TP_3.3V.TP | R17.1 17.8,24.09 v17.8,24.32 17.8,24.4 19.07,25.67 19.07,25.73 19.32,25.99 19.94,25.99 R18.1 20.35,25.95 20.39,25.95 20.74,25.61 IC3.10 21.87,25.75 21.87,25.86 22.14,26.14 22.8,26.14 23.07,25.86 23.07,25.75 IC3.7 23.57,25.95 24.26,25.95 24.86,25.35 C12.1 24.86,23.58 24.81,23.53 | v5.5,28.81 5.23,29.08 | 18.83,20.32 18.9,20.32 U$11.P$B1 | U$11.P$A22 25.24,22.1 v25.1,22.1 | 38.29,30.49 v37.51,30.49 36.99,30.49 C34.2 | IC3.3 22.87,23.91 22.87,23.8 23.02,23.65 23.56,23.65 23.98,23.23 24.51,23.23 24.81,23.53 | C19.1 18.88,15.39 19.27,15.39 v19.54,15.66 | 19.71,15.82 U$11.P$W1 | C33.1 44.82,19.01 42.41,19.01 | v24.82,23.07 v24.81,23.08 24.81,23.53
  Route63 0.152: v25.1,22.1 24.81,22.39 24.81,23.07 v24.82,23.07
  Bottom 0.127: 17.8,24.4 18.51,23.69 18.51,20.6 v18.3,20.81 | v5.5,28.81 9.91,24.4 17.8,24.4 | 37.1,27.7 37.1,26 v42.8,20.3 39.7,20.3 33.63,14.24 33.63,13.2 32.56,12.13 31.69,12.13 v30.86,11.3 | v17.8,24.32 17.8,24.4
  Bottom 0.152: v37.51,30.49 37.1,30.08 37.1,27.7 v33.4,24 32.06,22.66 25.68,22.66 25.27,23.07 v24.82,23.07 | 18.51,20.6 17.09,19.18 17.09,16.73 17.63,16.18 17.63,15.77 18.6,14.8 19.5,14.8 19.5,15.61 v19.54,15.66
ALERT
  Top 0.152: U$11.P$J24 26.24,18.35 28.45,20.55 28.45,23.05 28.44,23.05 28.44,32.54 28.86,32.96 29.14,32.96 U3.5
D+
  Top 0.152: D3.4 12.58,31.42 13.26,30.74 13.26,21.9 13.15,21.79 13.15,19.39 15.44,17.1 15.73,17.1 17.62,15.22 17.62,13.69 18.83,12.48 20.48,12.48 21.14,13.13 21.14,14.12 21.24,14.22 U$11.P$AD6
D-  (via drill 0.35)
  Top 0.127: D3.6 10.02,34.27 v6.32,34.27 | U$11.P$AD4 20.74,13.96 20.49,13.71 v20.49,13.33
  Route63 0.127: v6.32,34.27 6.32,26.35 7.9,24.77 7.9,20.8 14.89,13.81 20.01,13.81 v20.49,13.33
DEC4_^
  Top 0.127: U$11.P$E24 27.9,20.98 27.9,21.72 26.97,22.65 25.02,22.65 25.01,22.63 24.2,22.63 23.48,23.35 23.05,23.35 22.75,23.05 C15.1 C16.1 C10.1 21.96,21.47 L3.2 20.99,20.5 U$11.P$B5
DN  (via drill 0.35)
  Top 0.152: J4.A7 22.9,29.12 22.9,29.63 23.02,29.75 23.48,29.75 23.6,29.63 23.6,29.12 J4.B7 23.75,28.46 22.9,27.61 v22.77,27.61 | D3.1 8.38,33.32 7.95,33.75 v7.05,33.75
  Route63 0.152: v7.05,33.75 6.8,33.5 6.8,28.7 7.89,27.61 v22.77,27.61
DP  (via drill 0.35)
  Top 0.152: D3.3 7.32,31.42 7.32,29.26 v7.38,29.2 | J4.A6 23.1,28.83 23.1,28.32 22.98,28.2 22.52,28.2 22.4,28.32 22.4,28.83 J4.B6 22.25,29.83 22.08,30 v22.08,30.05
  Route63 0.152: v22.08,30.05 20.23,28.2 8.38,28.2 v7.38,29.2
EPD_3V3
  Top 0.127: DMG2305UX-7.3 24.51,8.96 24.1,8.55
  Top 0.152: C1-EP-DR.1 24.25,8.09 EPD_C5.2 24.1,8.55 21.5,8.55 16.7,13.35 16.57,13.35 15.96,13.97 15.96,14.17 15.1,15.03 13.07,15.03 12.2,15.9 11.67,15.9 11.52,15.75 | 10.34,16.25 J1.15 J1.16 11.52,15.75 | L5.2 14.6,11.57 14.6,12.67 11.52,15.75
EPD_BUSY
  Top 0.152: J1.9 10.91,19.25 11.24,19.58 12.4,19.58 15.16,16.82 15.62,16.82 16.24,16.2 16.24,14.08 16.69,13.63 16.81,13.63 18.66,11.79 21.64,11.79 22.92,13.06 22.92,13.93 22.74,14.11 U$11.P$AD12
EPD_CS  (via drill 0.1 pad 0.05, 0.3 pad 0.04, 0.35)
  Top 0.127: U$11.P$K2 20.22,18.09 v20.18,18.09 | v18.1,17.35 17.44,18.01 15.7,18.01 15.44,18.27 15.44,18.83 14.26,20.01 v14.26,20.19 | v11.86,17.75 v11.85,17.75 J1.12
  Route63 0.127: v20.18,18.09 18.84,18.09 v18.1,17.35
  Bottom 0.127: v11.86,17.75 11.86,18.78 13.26,20.19 v14.26,20.19
EPD_DC  (via drill 0.3 pad 0.04, 0.35)
  Top 0.127: J1.11 12.03,18.25 12.07,18.29 14.88,15.48 v15.5,15.48 | v16.81,14.48 16.81,14.12 18.71,12.21 21.66,12.21 22.24,12.79 U$11.P$AD10
  Route63 0.127: v16.81,14.48 15.81,15.48 v15.5,15.48
EPD_RST  (via drill 0.1 pad 0.04, 0.35)  (1 unrouted)
  Top 0.127: J1.10 12.57,18.75 14.95,16.37 v15.43,16.37
  Bottom 0.127: v22.47,14.77 22.07,14.77 21.67,14.37 21.67,14.3 17.7,14.3 15.73,16.27 15.53,16.27 v15.43,16.37
GND  (via drill 0.35)  (20 unrouted)
  Top 0.127: 5.38,26.86 R_TYPE_SEL.1 6.37,26.86 6.47,26.76 R2_EP_DR.1 | IC3.9 IC3.8 22.72,25.39 22.38,25.04 v22.38,24.88 | J2.3 34.04,10.45 33.46,9.86 32.98,9.86 32.81,10.03 31.3,10.03 31.3,10.02 C14.2 29.66,9.23 SW_ENT.1 24.4,7.08 24.59,7.27 24.59,7.38 C1-EP-DR.2 24.77,7.97 25.05,8.26 25.05,8.37 EPD_C5.1 | IC9.C2 IC9.C3 | U3.6 30.04,32.62 U3.9 30.7,31.96 30.7,31.93 31.01,31.62 U3.1 31.41,31.76 C37.1 | C10.2 23.27,21.48 C16.2 23.3,22.21 | C13.2 24.3,21.69 24.3,21.8 24.18,21.91 23.59,21.91 23.3,22.21 | C11.2 24.96,19.55 U$11.P$78 | C15.2 23.3,22.91 23.3,22.21 | TP_GND.TP 5.65,3.13 D4.1
  Top 0.152: J4.SH2 18.38,33.4 17.6,33.4 16.5,34.5 13.29,34.5 13.05,34.26 C43.1 13.22,33.56 13.35,33.56 13.51,33.4 v15.5,33.4 | J4.A1_B12 26.2,28.2 26.8,27.6 | J4.A12_B1 19.8,27.9 19.4,27.5 19,27.5 18.68,27.82 J4.SH4 | J4.SH3 27.32,28.12 27.17,27.97 | J4.SH1 28.1,33.7 28.46,34.06 30.82,34.06 31.27,33.6 U3.4 30.99,33.12 30.69,32.82 30.69,32.77 U3.9 | 36.36,33.64 C32.1 36.37,34.2 | 37.92,33.67 C4.2 | C4.2 37.97,33.69 | SW_DN.1 v35.4,5.1 | v35.4,5.1 | 36.37,34.2 35.1,34.2 33.78,32.88 33.78,31.4 33.72,31.34 | 36.37,34.2 37.19,34.2 | 37.19,34.2 37.94,34.2 | 37.94,34.2 38.7,34.2 | 38.7,34.2 38.98,34.2 v39.5,33.68 | C3.2 38.69,34.19 38.7,34.2 | C4.2 37.94,34.2 | 37.19,34.2 C22.2 | 6.45,33.25 6.1,33.6 3.89,31.39 TP_BAT_GND.TP | 39.94,25.1 C42.1 | 39.9,25.1 39.94,25.1 | C39.2 39.9,25.77 39.9,25.1 | 39.94,25.1 40.86,25.1 C38.1 | C29.1 39.45,17.93 C30.1 | C27.1 41.64,20.02 R9.1 | IC1.D2 40.99,21.85 R9.1 | J1.MP1 7.79,23.86 EPD_C2.1 EPD_C1.1 7.7,20.55 7.7,19.8 | 7.7,19.8 EPD_C6.1 7.86,19.03 7.86,18.9 8.29,18.47 | J1.8 7.74,19.75 7.7,19.8 | 8.29,18.47 EPD_C11.1 8.29,16.57 7.46,15.73 7.46,11.58 EPD_C12.1 7.66,11.38 7.66,11.25 7.78,11.13 7.8,11.13 J1.MP2 | EPD_C10.1 EPD_C9.1 EPD_C8.1 EPD_C7.1 8.29,15.78 8.82,15.78 8.92,15.87 8.92,16.07 9.15,16.3 9.15,17.32 8.37,18.1 8.37,18.4 8.29,18.47 | v42.1,19.66 41.82,19.38 R9.1 | 5.38,26.86 v5.09,26.39 5.09,27.73 4.98,27.84 SJ1.1 5.77,27.84 6.45,28.53 6.45,33.25 | 30.9,26.8 30.48,26.38 30.48,25.71 30.75,25.44 IC9.B1 IC9.C1 IC9.C2 | 6.45,33.25 7.15,33.25 8.04,32.37 D3.2 | 30.9,26.8 31.81,26.8 C24.1 31.88,26.99 32.16,27.28 32.89,27.28 C23.2 | C20.2 18.93,13.85 C21.2 18.59,13.87 C19.2
  Top 0.152: C7.2 45.41,20.16 C25.2 C33.2 45.39,18.05 C6.2 45.41,17.06 v45.35,17 45.35,16.45 45.14,16.23 C8.2 | 24.88,27.43 R1_USB.1 | U$11.P$F23 25.09,19.07 U$11.P$78 | 30.9,26.8 v31.1,26.6 | C34.1 36.29,30.4 | v40.21,25.41 39.9,25.1 | 33.72,31.34 33.3,31.76 C37.1 | 24.88,27.43 24.49,27.43 R2_USB.2 | v35.4,5.1 35.4,6.69 36.62,7.92 36.62,9.16 35.76,10.03 J2.5 | 24.88,27.43 25.06,27.43 25.12,27.38 26.58,27.38 26.8,27.6 | SW_UP.1 v13.4,5.32 | 36.29,30.4 36.29,30.79 v36.8,31.3 | 33.72,31.34 33.72,31.03 IC2.B1 | 36.29,30.4 IC2.B3 | 26.8,27.6 27.17,27.97 | 27.17,27.97 v27.27,27.97
  pour Route2: 36.6,0.2 39.5,0.2 45.8,6.5 45.8,28.5 45.3,28.5 39,34.8 6.9,34.8 0.2,28.1 0.2,24.6 7.2,24.6 7.2,10.4 0.2,10.4 0.2,6.8 6.8,0.2 9.4,0.2 9.4,2 14.6,2 14.6,0.2 20.4,0.2 20.4,2 25.6,2 25.6,0.2 31.4,0.2 31.4,2 36.6,2
HAPTIC_EN  (via drill 0.35)
  Top 0.127: U$11.P$U1 19.51,16.32 19.03,15.84 v18.68,15.84 | v34.33,32.67 34.44,32.56 34.44,30.99 IC2.A1
  Bottom 0.127: v18.68,15.84 18.35,15.84 17.36,16.84 17.36,19.06 23.28,24.98 23.28,25.73 24,26.44 28.11,26.44 v34.33,32.67
IMU_INT1  (via drill 0.3 pad 0.04)
  Top 0.127: IC3.5 23.35,24.58 24.17,23.76 v24.17,23.66 | v19.15,16.77 19.2,16.77 U$11.P$N1
  Bottom 0.127: v19.15,16.77 19.15,20.21 22.6,23.66 v24.17,23.66
IMU_INT2  (via drill 0.1 pad 0.05, 0.3 pad 0.04)
  Top 0.127: v20.18,17.05 20.2,17.07 U$11.P$P2 | IC3.6 23.8,25.08 23.97,25.25 v23.97,25.52
  Bottom 0.127: v23.97,25.52 24.3,25.52 24.59,25.24 24.59,23.65 21.8,20.85 21.8,17.93 21.44,17.57 20.71,17.57 v20.18,17.05
LX1
  Top 0.127: IC9.B2 IC9.B3
  Top 0.152: IC9.B3 31.68,25.35 33.21,25.35 34.24,25.35 L7.1
LX2
  Top 0.152: IC9.D2 IC9.D3 31.68,24.55 33.49,24.55 33.96,24.08 L7.2
MOSI  (via drill 0.1 pad 0.04, 0.35)
  Top 0.127: J1.14 10.78,16.59 11.05,16.59 11.34,16.31 v13.2,16.31 | U$11.P$B13 22.99,20.36 v23.01,20.38
  Route63 0.127: v23.01,20.38 22.59,19.96 20.94,19.96 19.78,18.8 14.48,18.8 13.2,17.52 v13.2,16.31
N$1
  Top 0.127: L2.2 L3.1
N$2
  Top 0.152: D2.1 0.45,8.39 C2-EP-DR.1 0.45,6.05 1.46,5.04 D4.2
N$3  (via drill 0.3 pad 0.04)
  Top 0.127: Q3.3 14.8,23.05 v14.8,23.6 | v14.86,14.56 15.3,14.12 15.3,13.5
  Top 0.152: C2-EP-DR.2 14.72,6.8 L5.1 15.45,6.14 18.2,6.14 18.2,11.45 17.48,12.17 17.34,12.17 15.88,13.63 D5.2 15.3,13.5
  Bottom 0.127: v14.8,23.6 14.86,23.54 v14.86,14.56
N$7
  Top 0.152: R9.2 40.28,19.55 IC1.D1
N$8
  Top 0.127: U$11.P$D2 20.24,20.16 20.2,20.2 20.2,20.4 18.8,21.8 C17.2 18.26,21.45 X2.1
N$9
  Top 0.127: U$11.P$F2 20.2,19.11 19.16,19.11 19,18.95 18.73,18.95 C18.2 17,18.73 X2.2
N$12
  Top 0.127: C5.1 18.77,19.79 18.8,19.82 U$11.P$C1
N$14
  Top 0.127: 20.94,21.25 21.22,21.25 20.94,21.25 | 20.94,21.25 20.67,20.99 20.67,20.54 20.49,20.36 U$11.P$B3 | L2.1 20.94,21.43 20.94,21.25
N$15  (via drill 0.35)
  Top 0.152: v37.2,21.5 36.38,20.68 X1.3 | C2.1 25.89,20.97 U$11.P$A23 | 25.94,21.59 C2.1 | C2.1 26.21,21.63 v26.78,22.21
  Route63 0.152: v37.2,21.5 36.32,20.62 28.37,20.62 v26.78,22.21
N$25
  Top 0.127: U$11.P$A18 23.96,21.09 C13.1
N$26
  Top 0.127: U$11.P$D23 25.61,19.7 25.61,20.07 25.48,20.2 C11.1
N$27
  Top 0.152: IC2.A2 34.85,31.58 36.37,33.1 C32.2
N$28  (via drill 0.35)
  Top 0.127: C1.1 35.44,17.36 33.7,19.1 | v26.77,21.29 26.77,20.85 U$11.P$B24 | X1.1 34.4,18.97 34.38,18.97 34.25,19.1 33.7,19.1 | 33.7,19.1 33.54,19.26 v33.54,19.54
  Route63 0.127: v26.77,21.29 27.8,20.26 32.54,20.26 33.26,19.54 v33.54,19.54
N$29
  Top 0.127: R2_EP_DR.2 7.31,26.65 8.14,26.65 11.25,23.53 Q3.1
N$30  (via drill 0.35)
  Top 0.152: C3.1 38.69,32.7 38.62,32.63 L1.1 39.02,32.13 39.4,32.51 v39.4,32.7 | U$11.P$H23 26.06,18.57 28.17,20.68 28.17,22.93 27.9,23.2 v27.9,27.45
  Route63 0.152: v39.4,32.7 35.19,32.7 30.09,27.6 28.05,27.6 v27.9,27.45
N$31
  Top 0.152: U$11.P$N24 26.98,17.32 C9.1
N$32
  Top 0.152: J1.24 10.43,11.55 EPD_C12.2
N$34
  Top 0.152: SJ1.2 3.71,26.32 4.11,25.92 6.32,25.92 6.53,26.12 | R1_EP_DR.1 6.68,26.28 6.53,26.12 | 6.53,26.12 6.33,26.32 6,26.32 R_TYPE_SEL.2
N$35
  Top 0.152: J1.22 8.9,12.75 EPD_C10.2
N$37
  Top 0.152: EPD_C8.2 9.3,13.75 J1.20
N$38
  Top 0.152: EPD_C7.2 8.99,15.1 9.84,14.25 J1.19
N$39
  Top 0.152: EPD_C6.2 8.21,18.95 8.65,18.51 8.65,18.21 9.47,17.39 9.47,15.62 10.19,14.9 10.48,14.9 J1.18
N$46  (via drill 0.35)
  Top 0.152: L1.2 37.54,32.21 37.54,32.55 37.94,32.95 C4.1 | L1.2 37.69,32.06 37.19,32.56 C22.1 | ANT1.1 44.42,26.92 v45.2,27.7 | v38.09,31.26 38.09,31.66 L1.2
  Route63 0.152: v38.09,31.26 41.65,27.7 v45.2,27.7
N$50
  Top 0.127: U$11.P$AC5 20.78,14.61 20.12,14.61 19.88,14.37 19.88,14.29 C20.1
N$53
  Top 0.152: EPD_C1.2 8.9,21.25 J1.5
N$54
  Top 0.152: J1.4 10.48,21.9 10.19,21.9 9.69,22.4 EPD_C2.2
N$60
  Top 0.152: J4.A5 24.25,27.94 R1_USB.2
N$63
  Top 0.152: J4.B5 21.4,28.83 21.4,28.22 22.56,27.05 23.55,27.05 R2_USB.1
N$73
  Top 0.152: R4.2 30.66,24.73 30.7,24.73 IC9.D1
N$75  (via drill 0.35)
  Top 0.152: 19.39,22.52 R2.2 19.51,22.46 v19.51,21.98 | IC9.E1 30.79,20.53 31.77,19.54 v32.26,19.54
  Route63 0.152: v19.51,21.98 20.08,21.41 22.83,21.41 24.26,19.98 25.76,19.98 26.99,18.74 31.46,18.74 v32.26,19.54
N$85
  Top 0.152: IC3.1 21.55,24.23 20.8,24.23 R3.1
P0.13  (via drill 0.3 pad 0.04, 0.35)
  Top 0.152: R5.1 40.34,18.5 39.69,18.5 C30.2 38.72,18.32 v38.6,18.2 | v10.6,5.6 SW_UP.2 | SW_UP.2 | U$11.P$AD8 21.59,14.17 21.58,14.17 21.41,14 21.41,13.43 21.75,13.09 v21.75,12.93
  Route63 0.152: v10.6,5.6 10.9,5.9 17.72,5.9 21.75,9.93 v21.75,12.93 21.99,12.7 22.45,12.7 23.26,11.89 32.28,11.89 33.07,11.1 38.5,11.1 38.6,11.2 v38.6,18.2
P0.14  (via drill 0.1 pad 0.05, 0.3 pad 0.04, 0.3 pad 0.05)
  Top 0.127: v21.2,5.6 21.2,4.36 SW_ENT.2 | U$11.P$AC9 21.58,14.82 21.51,14.75 v21.49,14.75 | C31.2 39.45,19.26 39.02,19.26 38.99,19.3 v38.1,19.3
  Top 0.152: R8.1 40.01,18.88 39.7,19.2 C31.2
  Bottom 0.127: v21.49,14.75 21.49,15.23 21.8,15.54 21.8,16.02 22.16,16.38 34.58,16.38 | 34.58,16.38 35.17,16.38 v38.1,19.3 | v21.2,5.6 23.8,5.6 30.46,12.26 30.46,14.24 31.33,15.11 33.31,15.11 34.58,16.38
P1.01
  Top 0.127: U$11.P$Y23 25.74,14.73 26.27,14.2 26.7,14.2 27.37,13.54 R_PWR_EPD.1 27.37,11.58 DMG2305UX-7.1
P1.02  (via drill 0.3 pad 0.25)
  Top 0.127: SW_DN.2 32.6,5.6 v32.7,5.7
  Top 0.152: R7.1 39.81,17.28 C29.2 39.76,16.85 39.76,16.71 39.67,16.62 | U$11.P$W24 26.34,15.82 27.38,16.85 31.79,16.85 32.13,16.51 39.56,16.51 39.67,16.62 | 39.67,16.62 41.49,16.62 41.72,16.39 41.72,12.48 42.77,11.42 42.95,11.42 43.95,10.42 43.95,6.99 42.66,5.7 v36.3,5.7
  Route63 0.152: v36.3,5.7 v32.7,5.7
PMIC_INT  (via drill 0.1 pad 0.04, 0.35)
  Top 0.127: IC1.A1 39.44,23.36 39.34,23.46 v38.84,23.46 | v20.18,16.09 20.18,16.52 U$11.P$T2
  Bottom 0.127: v38.84,23.46 38.66,23.46 37.14,21.94 37.02,21.94 33.85,18.78 23.36,18.78 22.98,18.41 22.98,17.92 22.64,17.57 22.16,17.57 21.78,17.2 21.78,16.72 21.44,16.38 20.95,16.38 20.66,16.09 v20.18,16.09
PREVGH
  Top 0.152: EPD_C9.2 8.99,13.5 9.29,13.2 10.57,13.2 J1.21 11.21,13.25 11.59,13.63 D5.1
PREVGL
  Top 0.152: EPD_C11.2 8.64,16.63 8.64,16.5 8.19,16.06 8.18,16.06 7.75,15.63 7.75,12.15 10.53,12.15 J1.23 11.25,12.25 11.7,11.8 11.7,9 11.3,8.6 4.66,8.6 D2.2
RESE
  Top 0.152: Q3.2 12.36,22.4 10.77,22.4 J1.3 10.34,22.25 9.9,22.69 9.9,24.32 R1_EP_DR.2
RESET  (via drill 0.1 pad 0.05, 0.3 pad 0.05)
  Top 0.127: U$11.P$AC13 23.01,14.8 v23.01,14.77 | J2.6 36.23,12.19 36.23,12.43 36.7,12.89 v37.99,12.89 v38,12.9 41.16,9.74 41.16,9.53 42.36,8.32 TP_RESET.TP
  Route63 0.127: v38,12.9 35.79,15.11 31.33,15.11 30.99,14.77 26.46,14.77 v23.01,14.77
SCK  (via drill 0.1 pad 0.04, 0.35)
  Top 0.127: J1.13 10.78,17.09 12.54,17.09 v12.63,17 | U$11.P$A12 22.72,20.84 v22.72,20.88
  Route63 0.127: v22.72,20.88 22.06,20.22 20.84,20.22 19.72,19.1 14.19,19.1 12.64,17.56 12.64,17.02 v12.63,17
SCL  (via drill 0.1 pad 0.05, 0.3 pad 0.04, 0.35)
  Top 0.127: 34.35,29.95 IC2.C1 | U$11.P$M2 v20.18,17.57 | 19.18,24.38 17.96,23.16 R17.2 | 19.18,24.38 19.8,25 v20.1,25 | IC3.12 21.61,24.49 20.69,24.49 20.58,24.38 19.18,24.38
  Top 0.152: R4.1 29.87,26.2 32.31,28.64 32.81,28.64 33.95,29.78 34.23,29.78 IC2.C1 34.63,29.62 TP_SCL.TP 34.7,28.11 v36.23,28.11 | U3.7 29.02,32.12 28.8,31.9 28.72,31.82 28.72,31.38 29.76,30.34 R4.1 | v38.91,26.71 37.8,25.6 37.8,23.85 38.65,23 40.23,23 IC1.B1 | R17.2 16.45,23.16 13.81,20.53 13.81,19.52 15.67,17.66 17.16,17.66 v18.3,16.52 | R4.1 29.54,25.97 29.5,25.97 29.38,25.85 29.38,24.54 v29.05,24.2
  Route63 0.127: v18.3,16.52 18.3,16.77 19.1,17.57 v20.18,17.57 | v29.05,24.2 21.2,24.2 20.41,25 v20.1,25
  Route63 0.152: v36.23,28.11 37.09,28.11 38.49,26.71 v38.91,26.71
SDA  (via drill 0.1 pad 0.04, 0.3 pad 0.04, 0.35)  (3 unrouted)
  Top 0.127: U3.8 29.3,31.18 v30.75,29.73 31.17,30.15 34.15,30.15 | R18.2 19.57,25.62 v19.5,25.56 | U$11.P$L1 17.99,17.82 17.55,18.26 15.8,18.26 15.69,18.37 15.69,22.03 16.48,22.82 18.59,22.82 19.78,24.01
  Top 0.152: IC1.C1 40.18,22.66 38.56,22.66 37.42,23.8 37.42,26.03 38.37,26.98 TP_SDA.TP | R2.1 20.48,23.12 21.39,23.12 22.07,23.8 22.07,23.91 IC3.2 | R2.1 20.02,22.66 | R2.1 19.94,22.96 19.78,23.12 v19.78,23.84 19.78,24.01
  Route63 0.127: v19.5,25.56 19.5,26 20.4,26.9 22.9,26.9 24.54,28.54 29.56,28.54 v30.75,29.73
  Route63 0.152: v19.5,25.56 19.5,24.29 19.78,24.01 v19.78,23.84
  other vias: 35.61,31.35
SWDCLK
  Top 0.152: J2.4 34.49,11.81 33.45,12.85 33.45,14.24 32.37,15.32 | 32.37,15.32 U$11.P$AA24 | 32.37,15.32 37.25,15.32 TP_SWDCLK.TP
SWDIO
  Top 0.127: J2.2 33.13,11.63 32.53,11.63 32.13,12.03 29.34,12.03 28.12,13.25 28.02,13.25 27.93,13.33 | U$11.P$AC24 26.45,14.82 27.93,13.33 | 27.93,13.33 28.29,13.33 TP_SWDIO.TP
SWO
  Top 0.127: U$11.P$AD22 25.24,13.36 TP_SWO.TP
VBAT
  Top 0.127: U3.3 U3.2 C37.2
  Top 0.152: 42.32,24.18 40.71,22.56 IC1.C2 | 42.32,24.18 42.32,20.81 C27.2 | 42.32,24.18 42.32,27.03 43.9,28.6 43.9,30.45 43.19,31.16 42.34,31.16 TP_VBAT.TP 39.95,33.54 39.95,33.87 39.34,34.48 34.98,34.48 33.12,32.62 U3.3
VBUS  (via drill 0.35)  (1 unrouted)
  Top 0.127: C21.1 18.27,13.67 18.27,13.56 18.73,13.1 19.32,13.1 20.15,13.93 20.15,14.23 U$11.P$AD2
  Top 0.152: C43.2 13.05,32.62 12.73,32.3 | 12.73,32.3 11.04,32.3 D3.5 | 12.73,32.3 18.23,26.8 19.8,26.8 20.6,27.6 J4.A9_B4 20.87,29.24 20.87,30.76 21.57,31.45 23.28,31.45 25.1,29.63 25.1,29.27 J4.A4_B9 25.3,28.88 v25.3,27.83 | C42.2 41.77,25.96 41.77,24.57 | 41.77,24.57 C38.2 | 41.77,24.57 41.77,24.45 IC1.A2 40.58,23.46 40.58,23.49 40.41,23.66 40.24,23.66 v39.1,24.8 | C21.1 17.89,14.05 17.89,15.33 15.85,17.38 15.55,17.38 13.43,19.5 13.43,20.54 17.05,24.17 v17.05,25.95 18.89,25.95 19.44,26.5 24.7,26.5 25.1,26.9
  Route63 0.152: v39.1,24.8 35.19,20.9 32.73,20.9 29.66,23.96 29.66,24.57 26.4,27.83 v25.3,27.83
VREG  (via drill 0.35)
  Top 0.152: IC1.B2 40.71,22.96 42.03,24.28 42.04,24.3 42.04,27 | 42.04,27 40.56,27 C39.1 39.7,26.14 39.34,26.14 v38.59,25.39 | 42.04,27 42.04,27.14 42.7,27.8 TP_VREG.TP | IC9.A1 IC9.A2 IC9.A3 32.29,26.54 32.3,26.54 32.38,26.63 C24.2 33.4,25.84 v33.4,25.8 33.36,25.84 C23.1
  Route63 0.152: v33.4,25.8 32.6,25 32.6,23.4 33.1,22.9 36.1,22.9 v38.59,25.39